# Altium PCB esp32v4.PcbDoc (part 1 of 3)
Units mm, origin at the board's own origin, x right, y up, seen from the top; angles counter-clockwise.
Board outline 100.25 x 100.25 mm, 2 copper layers (Top Layer, Bottom Layer), stack 1.536 mm thick; 107 components, 81 nets, 416 pads, 1990 vias.
Unrouted connection lines stored in the file: 16.
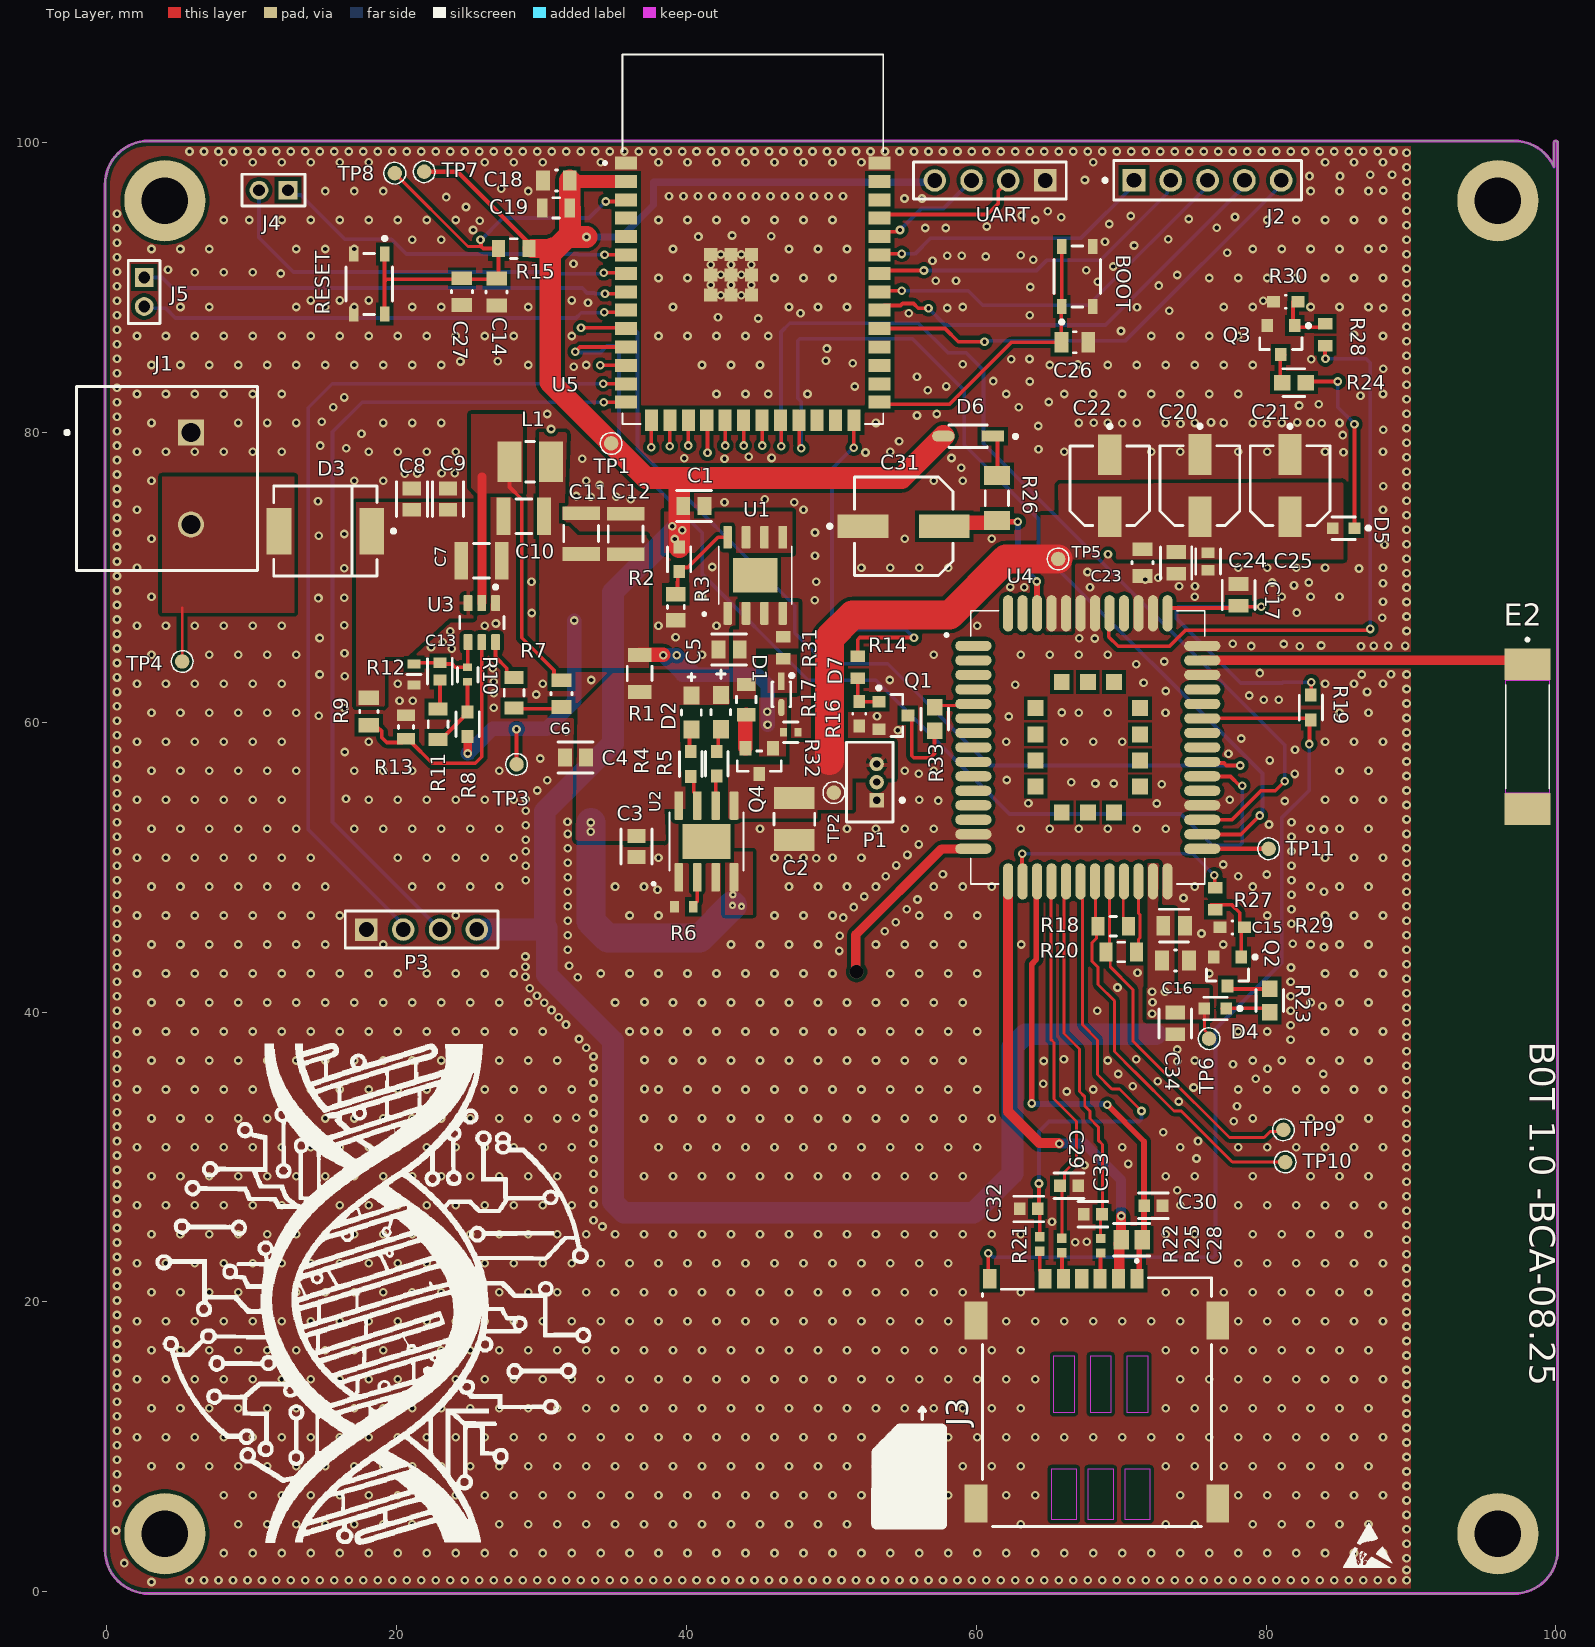
[diagram p0: Top Layer view]
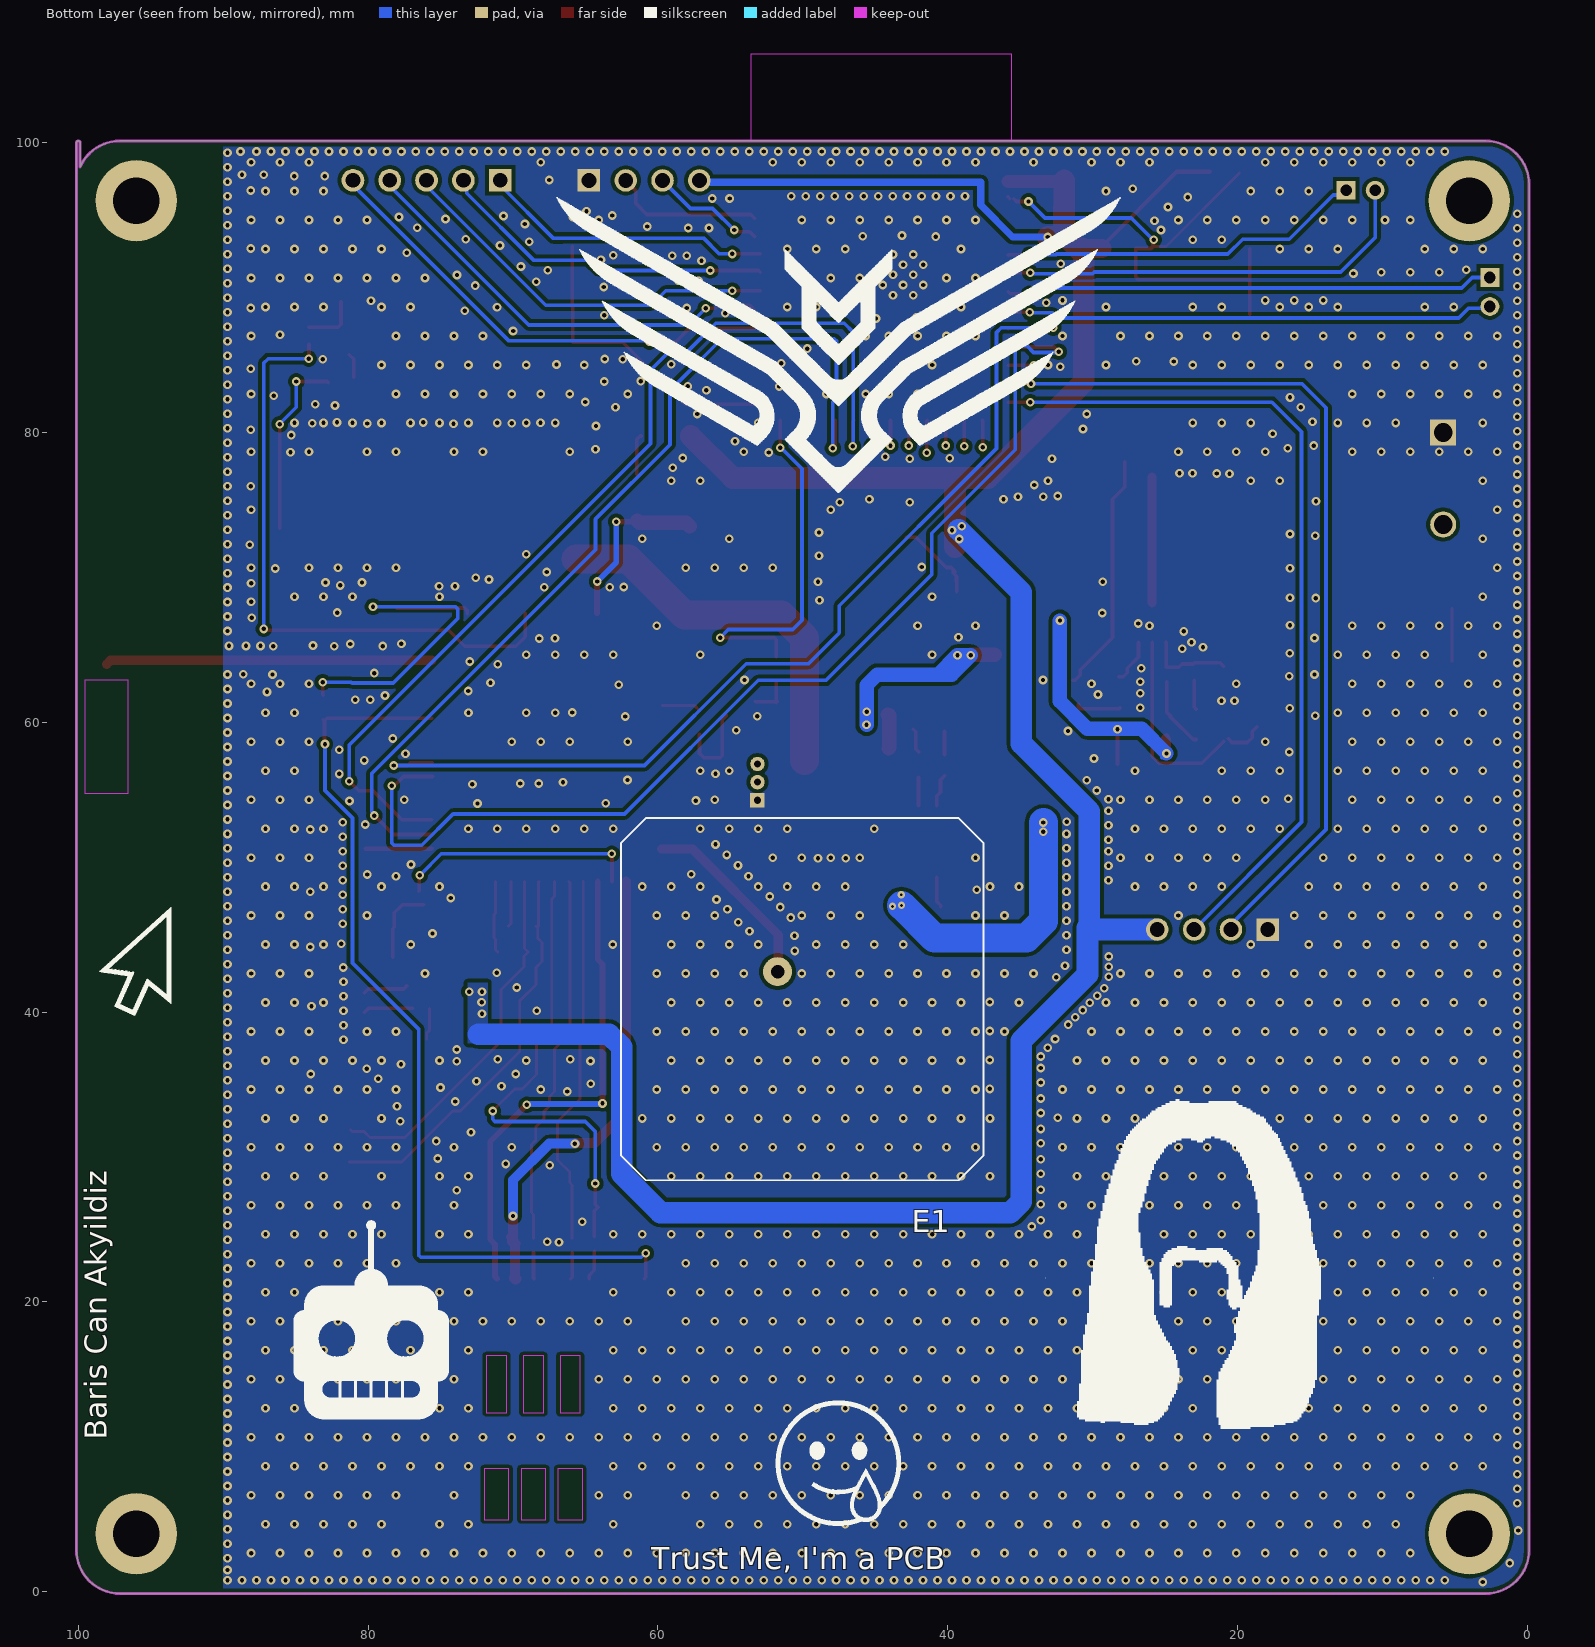
[diagram p1: Bottom Layer view, seen from below]
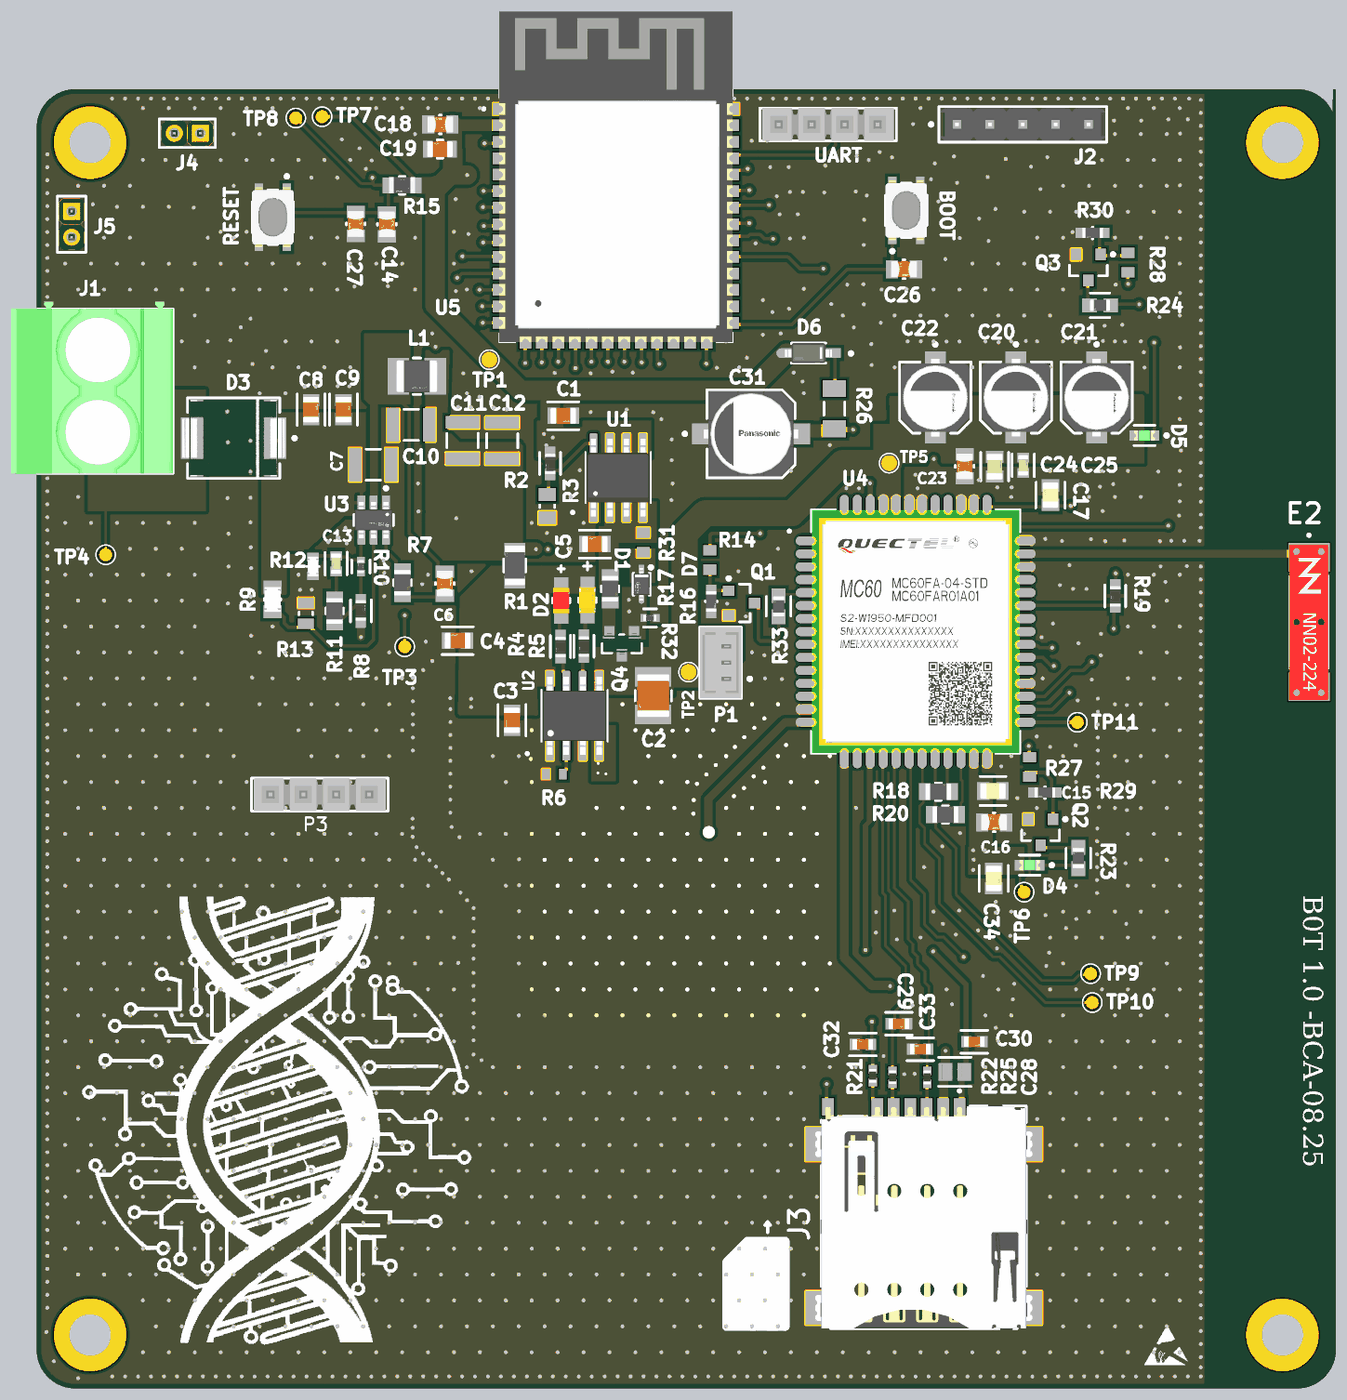
[diagram p3: 3D render of the assembled board from above, using the file's embedded part models]

## Layer stack, top to bottom
Top Solder: solder mask 0.0102, Solder Resist, Dk 3.5
Top Layer: signal copper 0.0356
Dielectric 1: dielectric 1.465, FR-4, Dk 4.8
Bottom Layer: signal copper 0.0356
Bottom Solder: solder mask 0.0102, Solder Resist, Dk 3.5

## Board outline
-0.127,2.875 ccw(c2.875,2.875) 2.875,-0.127 97.125,-0.127 ccw(c97.125,2.875) 100.127,2.875 100.127,100 ccw(c100,100) 99.873,100 99.873,98.335 ccw(c97.125,97.125) 97.125,100.127 2.876,100.127 2.875,100.127 ccw(c2.875,97.125) -0.127,97.127 -0.127,97.125

## Design rules (kind name [scope] priority, off if disabled: settings)
Clearance [InNet('NetE1_1') vs InNet('NetE1_1')] p1: gap=0.152 ignorepadtopadclearanceinfootprint=TRUE
Clearance Clearance_3 [InNet('GNSS_ANT') vs InNet('GNSS_ANT')] p2: gap=0.152 ignorepadtopadclearanceinfootprint=TRUE
Clearance Clearance_2 [All] p3: gap=0.254 ignorepadtopadclearanceinfootprint=TRUE
Clearance Clearance_1 [All] p4: gap=0.1 ignorepadtopadclearanceinfootprint=TRUE
HoleSize [All] p1: absolutevalues=TRUE maxlimit=8 minlimit=0.025 maxpercent=80.000 minpercent=20.000
HoleToHoleClearance [All] p1: gap=0.2 allowstackedmicrovias=TRUE
MinimumSolderMaskSliver [All] p1: minsoldermaskwidth=0.04
PolygonConnect [All] p1: connectstyle=Direct reliefconductorwidth=0.254 reliefentries=4 polygonreliefangle="90 Angle" airgapwidth=0.254
RoutingVias [All] p1: holewidth=0.3 width=0.45 viastyle="Through Hole" minholewidth=0.15 minwidth=0.4 maxholewidth=6.3 maxwidth=6.3
SilkToSilkClearance [All] p1: silktosilkclearance=0.08
SilkToSolderMaskClearance [IsPad] p1: minsilkscreentomaskgap=0.15 clearancetoexposedcopper=TRUE
SolderMaskExpansion [All] p1: expansion=0.102 istentingtop=FALSE
SupplyNets "Schematic Supply Nets_3" [InNet('VBAT')] p1: voltage=0.000
SupplyNets "Schematic Supply Nets_2" [InNet('+12')] p2: voltage=0.000
SupplyNets "Schematic Supply Nets" [InNet('5V')] p3: voltage=0.000
SupplyNets "Schematic Supply Nets_1" [InNet('GND')] p4: voltage=0.000
UnRoutedNet [All] p1: checkbadconnections=TRUE
Width [InNet('NetE1_1')] p1: maxlimit=0.7 minlimit=0.254 preferedwidth=0.254
Width Width_2 [InNet('GNSS_ANT')] p2: maxlimit=0.7 minlimit=0.254 preferedwidth=0.254
Width Width_1 [All] p3: maxlimit=9 minlimit=0.15 preferedwidth=0.254
24 further rules are at their usual default settings.

## Classes and differential pairs
component class pwrmngmnt: C1 C2 C3 C4 C5 C6 C7 C8 C9 C10 C11 C12 C13 D1 D2 D3 D7 J1 L1 P1 Q4 R1 R2 R3 R4 R5 R6 R7 R8 R9 R10 R11 R12 R13 R17 R31 R32 TP1 TP2 TP3 TP4 U1 U2 U3
component class esp32v4: BOOT C14 C15 C16 C17 C18 C19 C20 C21 C22 C23 C24 C25 C26 C27 C28 C29 C30 C31 C32 C33 C34 D4 D5 D6 E1 E2 J2 J3 J4 J5 P3 Q1 Q2 Q3 R14 R15 R16 R18 R19 R20 R21 R22 R23 R24 R25 R26 R27 R28 R29 R30 R33 RESET TP5 TP6 TP7 TP8 TP9 TP10 TP11 U4 U5 UART

## Components (designator, comment, footprint, x,y, rotation, side; value= is the part's Value field where it differs from the comment)
BOOT "PTS810SJM250SMTRLFS" FP-PTS810SJM250SMTRLFS-MFG 66.975,90.775 r90 top
C1 "10uF" FP-GRM21B-0_1-IPC_C 40.51,74.925 r0 top
C2 "10uF" FP-1210-L_3_3_0_4-W_2_5_0-IPC_B 47.45,53.325 r270 top
C3 "10uF" FP-GRM21B-0_1-IPC_C 36.55,51.435 r270 top
C4 "10uF_NC" FP-GRM21B-0_1-IPC_C 32.35,57.575 r180 top value=10uF
C5 "10uF" FP-GRM21B-0_1-IPC_C 42.95,65.025 r180 top
C6 "0.1UF" FP-CC0805-0_85-MFG 31.369,61.976 r90 top value="100 nF"
C7 "10uF" CAPC1210(3225)280_L 25.85,71.15 r0 top
C8 "10uF_NC" FP-GRM21B-0_1-IPC_C 21.05,75.4 r90 top value=10uF
C9 "10uF" FP-GRM21B-0_1-IPC_C 23.55,75.4 r90 top
C10 "22uF_NC" CAPC1210(3225)230_L 28.775,74.225 r180 top value=22uF
C11 "22uF" CAPC1210(3225)230_L 32.735,73.025 r90 top
C12 "22uF" CAPC1210(3225)230_L 35.8,73 r90 top
C13 "82PF" FP-C0603C-CF-MFG 22.985,63.513 r90 top value="82 pF"
C14 "0.1uF" FP-CC0805-0_85-MFG 26.9,89.7 r90 top value="100 nF"
C15 "10uF" FP-C0805C106K4PACTU-MFG 73.66,45.974 r0 top
C16 "10uF" FP-CC0805-0_85-MFG 73.752,43.561 r0 top value="100 nF"
C17 "10uF" FP-C0805C106K4PACTU-MFG 78.1,68.8 r90 top
C18 "0.1uF" FP-CC0805-0_85-MFG 31.025,97.4 r180 top value="100 nF"
C19 "22uF" FP-GRM21B-0_15-MFG 31,95.502 r180 top
C20 "100uF" FP-SC-MFG 75.438,76.336 r270 top
C21 "100uF" FP-SC-MFG 81.661,76.336 r270 top
C22 "100uF" FP-SC-MFG 69.215,76.327 r270 top
C23 "0.1uF" FP-CC0805-0_85-MFG 71.48,71.022 r270 top value="100 nF"
C24 "10pF" FP-C0805C-DN-MFG 73.8,71 r270 top value="10 pF"
C25 "33pF" FP-C0603C-CF-MFG 76,71.1 r270 top value="33 pF"
C26 "0.1UF" FP-CC0805-0_85-MFG 66.8,86.233 r0 top value="100 nF"
C27 "0.1UF" FP-CC0805-0_85-MFG 24.5,89.725 r270 top value="100 nF"
C28 "150nF" FP-CL21-IPC_C 70.725,24.3 r0 top
C29 "33pF" FP-0603-L_1_6_0_15-W_0_81-IPC_C 66.406,28.013 r0 top
C30 "33pF" FP-0603-L_1_6_0_15-W_0_81-IPC_C 72.225,26.625 r0 top
C31 "47uF" FP-OS-CON-SMT-C6-MFG 54.991,73.533 r0 top
C32 "33pF" FP-0603-L_1_6_0_15-W_0_81-IPC_C 63.618,26.416 r180 top
C33 "33pF" FP-0603-L_1_6_0_15-W_0_81-IPC_C 68.05,26.05 r180 top
C34 "10uF_NC" FP-C0805C106K4PACTU-MFG 73.725,39.225 r270 top
D1 "LED GREEN" FP-APT2012MGC-MFG 42.375,60.7 r270 top
D2 "LED RED" FP-AP2012EC-MFG 40.343,60.668 r270 top
D3 "SS34-E3/57T" FP-95402-MFG 15.075,73.2 r180 top
D4 "HSMR-C191" FP-HSMR-C191-MFG 76.5,40.25 r180 top
D5 "HSMR-C191" FP-HSMR-C191-MFG 85.356,73.406 r180 top
D6 "1N5819HW-7-F" FP-SOD123-IPC_A 59.436,79.756 r180 top
D7 "BAT60AE6327HTSA1" FP-PG-SOD323-2-IPC_C 46.55,61.925 r270 top
E1 "YFGC025WWB" XDCR_YFGC025WWB 50.038,40.894 r270 bottom
E2 "GSM_ANT NN02-224" XCVR_NN02-224 98.044,59.008 r270 top
J1 "1714955" PHOE-1714955_V 5.8,76.825 r270 top
J2 "22-28-4050" FP-22-28-4050-MFG 75.964,97.409 r0 top
J3 "SIM7100-6-1-15-00-A_REVC2" GCT_SIM7100-6-1-15-00-A_REVC2 68.326,13.081 r0 top
J4 "M22-2510205" FP-M22-2510205-MFG 11.5,96.725 r180 top
J5 "M22-2510205" FP-M22-2510205-MFG 2.575,89.7 r270 top
L1 "10uH" FP-CB3225-IPC_A 29.21,77.978 r0 top
P1 "530470310" MOLX-530470310_V 53.125,55.875 r270 top
P3 "TSW-104-08-L-S" SMTC-TSW-104-08-X-S 17.91,45.7 r0 top
Q1 "MMBT5088LT1G" ONSC-SOT-23-3-318-08_V 54.275,60.475 r0 top
Q2 "MMBT5088LT1G" ONSC-SOT-23-3-318-08_V 77.343,42.799 r270 top
Q3 "MMBT5088LT1G" ONSC-SOT-23-3-318-08_V 81.025,86.375 r270 top
Q4 "IRLML6402TRPBF" FP-Micro3-MFG 45.025,57.325 r270 top
R1 "0.4Ω" FP-CSR1206-IPC_C 36.767,63.373 r90 top
R2 "10K" FP-RT0603-MFG 39.497,71.247 r270 top value=10KΩ
R3 "45.3K" RESC2013X60X35NL10T20 39.275,67.95 r270 top
R4 "1K" FP-RT0603-MFG 40.3,57.125 r270 top value=1kΩ
R5 "1K" FP-RT0603-MFG 42.1,57.15 r270 top value=1kΩ
R6 "RC0603FR-071K2L" RESC1608X55X25LL10T15 39.825,47.275 r180 top
R7 "0 OHM" FP-RMCF0805-MFG 28.1,62.05 r270 top
R8 "49.9K" FP-RT0603-MFG 24.89,59.865 r90 top value=49.9KΩ
R9 "511kΩ" FP-CRCW0805-e3-IPC_B 18.075,60.75 r270 top value=511kR
R10 "100K" FP-RT0402-MFG 24.89,63.294 r90 top value=100KΩ
R11 "0 OHM" FP-RMCF0805-MFG 22.858,59.865 r270 top
R12 "13.3k" FP-ERJ3EK-MFG 21.2,63.3 r270 top
R13 "105K" RESC2013X60X35LL10T20 20.643,59.677 r270 top
R14 "RC0603JR-074K7L" RESC1608X55X25ML10T15 51.825,63.8 r270 top
R15 "10k" FP-RT0805-MFG 28.075,92.7 r180 top value=10KΩ
R16 "RC0603FR-0747KL" FP-RC0603FR-0747KL-MFG 51.925,60.6 r270 top
R17 "0 OHM" FP-RMCF0805-MFG 44.125,61.575 r270 top
R18 "0 OHM" FP-RMCF0805-MFG 69.45,45.925 r0 top
R19 "10k" FP-RT0603-MFG 83.1,61.025 r270 top value=10KΩ
R20 "0 OHM" FP-RMCF0805-MFG 70,44.15 r0 top
R21 "22Ω" RESC1005X40X25ML05T05 64.389,24.003 r270 top
R22 "22Ω" RESC1005X40X25ML05T05 65.913,23.884 r90 top
R23 "300Ω" FP-CRCW0603-e3-IPC_A 80.25,40.8 r90 top
R24 "300Ω" FP-CRCW0603-e3-IPC_A 81.925,83.45 r180 top
R25 "22Ω" RESC1005X40X25ML05T05 68.58,23.876 r90 top
R26 "470Ω" RESC3216X60X45ML10T20 61.425,75.475 r270 top
R27 "RC0603JR-074K7L" RESC1608X55X25ML10T15 76.5,47.825 r270 top
R28 "RC0603JR-074K7L" RESC1608X55X25ML10T15 84.075,86.75 r90 top
R29 "RC0603FR-0747KL" FP-RC0603FR-0747KL-MFG 77.675,45.85 r180 top
R30 "RC0603FR-0747KL" FP-RC0603FR-0747KL-MFG 81.354,89.027 r180 top
R31 "0 OHM" RESC1608X55X25ML10T15 46.675,65.15 r90 top
R32 "100K" FP-RT0402-MFG 47.2,59.325 r0 top value=100KΩ
R33 "300Ω" FP-CRCW0603-e3-IPC_A 57.125,60.225 r90 top
RESET "PTS810SJM250SMTRLFS" FP-PTS810SJM250SMTRLFS-MFG 18.1,90.25 r270 top
TP1 "Test point" Test_Point 34.8,79.25 r0 top
TP2 "Test point" Test_Point 50.175,55.15 r0 top
TP3 "Test point" Test_Point 28.275,57.1 r0 top
TP4 "Test point" Test_Point 5.2,64.2 r90 top
TP5 "Test point" Test_Point 65.65,71.275 r90 top
TP6 "Test point" Test_Point 76.066,38.166 r90 top
TP7 "Test point" Test_Point 21.9,98 r180 top
TP8 "Test point" Test_Point 19.871,97.9 r90 top
TP9 "Test point" Test_Point 81.2,31.875 r90 top
TP10 "Test point" Test_Point 81.325,29.65 r90 top
TP11 "Test point" Test_Point 80.175,51.275 r90 top
U1 "AP7362" SOIC127P600X163-9N 44.745,70.15 r90 top
U2 "TP4056" SOP127P600X175-9N 41.377,51.778 r90 top
U3 "TPS54302DDCR" FP-DDC0006A-MFG 25.877,66.882 r270 top
U4 "MC60" XCVR_MC60 67.7,58.275 r0 top
U5 "ESP32-S3-WROOM-1-N8R8" XCVR_ESP32S3WROOM1N8R8 44.577,93.345 r0 top
UART "TSW-104-08-L-S" SMTC-TSW-104-08-X-S 64.755,97.4 r180 top

## Footprints (in the part's own frame and the unit in brackets; to place one, negate y for a bottom-side part, rotate by r counter-clockwise, add the part's x,y. Pads: shape width x height; smd on the part's side, far side on the other; paste and mask are expansions set on the pad)
CAPC1210(3225)230_L [mm] "Chip Capacitor, Body 3.2x2.5mm, Height 2.3mm, IPC High Density"
  rect 0.95x2.6 smd: 1(-1.4,0) 2(1.4,0)
  silkscreen extent -0.55,-1.2 0.55,1.2, body extent -1.7,-1.35 1.7,1.35, height 2.3
CAPC1210(3225)280_L [mm] "Chip Capacitor, Body 3.2x2.5mm, Height 2.8mm, IPC High Density"
  rect 0.95x2.6 smd: 1(-1.4,0) 2(1.4,0)
  silkscreen extent -0.55,-1.2 0.55,1.2, body extent -1.7,-1.4 1.7,1.4, height 2.8
FP-22-28-4050-MFG [mm]
  rect 1.57x1.57 hole 1.02 paste-2539.97 mask+0: 1(-5.08,0)
  round 1.57 hole 1.02 paste-2539.97 mask+0: 2(-2.54,0) 3(0,0) 4(2.54,0) 5(5.08,0)
  silkscreen extent -7.2,-1.37 6.48,1.37, body extent -6.58,-1.47 6.58,1.47, height 0.25
FP-0603-L_1_6_0_15-W_0_81-IPC_C [mm]
  rect 0.807x0.868 smd paste+0 mask+0: 1(-0.626,0) 2(0.626,0)
  silkscreen extent -1.03,-0.88 1.03,0.88, body extent -1.13,-0.58 1.13,0.58, height 0.25
FP-1210-L_3_3_0_4-W_2_5_0-IPC_B [mm]
  rect 1.503x2.804 smd paste+0 mask+0: 1(-1.45,0) 2(1.45,0)
  silkscreen extent -0.4,-1.4 0.4,1.4, body extent -2.45,-1.65 2.45,1.65, height 0.25
FP-95402-MFG [mm]
  rect 1.72x3.2 smd paste+0 mask+0: 1(-3.205,0) 2(3.205,0)
  silkscreen extent -4.83,-3.11 3.55,3.11, body extent -4.17,-3.21 4.17,3.21, height 0.25
FP-AP2012EC-MFG [mm]
  rect 1.25x1.1 smd paste+0 mask+0: 1(-1.175,0) 2(1.175,0)
  silkscreen extent -2.7,-0.67 0.18,0.67, body extent -1.9,-0.77 1.9,0.77, height 0.25
FP-APT2012MGC-MFG [mm]
  rect 1.25x1.1 smd paste+0 mask+0: 1(-1.175,0) 2(1.175,0)
  silkscreen extent -2.93,-0.67 0.18,0.67, body extent -1.9,-0.77 1.9,0.77, height 0.25
FP-C0603C-CF-MFG [mm]
  rect 0.75x0.9 smd paste+0 mask+0: 1(-0.6,0) 2(0.6,0)
  silkscreen extent -0.87,-0.85 0.88,0.85, body extent -1.2,-0.6 1.2,0.6, height 0.25
FP-C0805C106K4PACTU-MFG [mm]
  rect 0.95x1.35 smd paste+0 mask+0: 1(-0.75,0) 2(0.75,0)
  silkscreen extent -1,-1.12 1,1.12, body extent -1.4,-0.85 1.4,0.85, height 0.25
FP-C0805C-DN-MFG [mm]
  rect 0.95x1.35 smd paste+0 mask+0: 1(-0.75,0) 2(0.75,0)
  silkscreen extent -1.1,-1.07 1.1,1.07, body extent -1.4,-0.85 1.4,0.85, height 0.25
FP-CB3225-IPC_A [mm]
  rect 1.654x2.806 smd paste+0 mask+0: 1(-1.426,0) 2(1.426,0)
  silkscreen extent -0.3,-1.4 0.3,1.4, body extent -2.75,-1.9 2.75,1.9, height 0.25
FP-CC0805-0_85-MFG [mm]
  rect 0.95x1.4 smd paste+0 mask+0: 1(-0.925,0) 2(0.925,0)
  silkscreen extent -0.08,-0.72 0.08,0.72, body extent -1.6,-1.05 1.6,1.05, height 0.25
FP-CL21-IPC_C [mm]
  rect 1.055x1.356 smd paste+0 mask+0: 1(-0.726,0) 2(0.726,0)
  silkscreen extent -1.25,-1.12 1.25,1.12, body extent -1.35,-0.82 1.35,0.82, height 0.25
FP-CRCW0603-e3-IPC_A [mm]
  rect 1.135x1.062 smd paste+0 mask+0: 1(-0.815,0) 2(0.815,0)
  silkscreen extent -0.75,-0.95 0.75,0.95, body extent -1.88,-1.03 1.88,1.03, height 0.25
FP-CRCW0805-e3-IPC_B [mm]
  rect 1.007x1.408 smd paste+0 mask+0: 1(-0.951,0) 2(0.951,0)
  silkscreen extent -0.07,-0.63 0.07,0.63, body extent -1.7,-0.95 1.7,0.95, height 0.25
FP-CSR1206-IPC_C [mm]
  rect 0.956x1.608 smd paste+0 mask+0: 1(-1.276,0) 2(1.276,0)
  silkscreen extent -0.5,-0.85 0.5,0.85, body extent -1.85,-0.95 1.85,0.95, height 0.25
FP-DDC0006A-MFG [mm]
  rrect17% 1.1x0.6 smd paste+0 mask+0: 1(-1.35,0.95) 2(-1.35,0) 3(-1.35,-0.95) 4(1.35,-0.95) 5(1.35,0) 6(1.35,0.95)
  silkscreen extent -2.57,-1.53 0.43,1.53, body extent -2,-1.63 2,1.63, height 0.25
FP-ERJ3EK-MFG [mm]
  rect 0.65x0.9 smd paste+0 mask+0: 1(-0.725,0) 2(0.725,0)
  silkscreen extent 0,-0.48 0,0.48, body extent -1.15,-0.58 1.15,0.58, height 0.25
FP-GRM21B-0_1-IPC_C [mm]
  rect 0.958x1.262 smd paste+0 mask+0: 1(-0.727,0) 2(0.727,0)
  silkscreen extent -1.21,-1.07 1.21,1.07, body extent -1.31,-0.77 1.31,0.77, height 0.25
FP-GRM21B-0_15-MFG [mm]
  rect 0.7x1.3 smd paste+0 mask+0: 1(-0.95,0) 2(0.95,0)
  silkscreen extent -0.23,-0.7 0.23,0.7, body extent -1.4,-0.8 1.4,0.8, height 0.25
FP-HSMR-C191-MFG [mm]
  rect 0.8x0.8 smd paste+0 mask+0: 1(-0.75,0) 2(0.75,0)
  silkscreen extent -1.83,-0.77 0.8,0.77, body extent -1.25,-0.55 1.25,0.55, height 0.25
FP-M22-2510205-MFG [mm]
  rect 1.3x1.3 hole 0.8 paste-2539.97 mask+0: 1(-1,0)
  round 1.3 hole 0.8 paste-2539.97 mask+0: 2(1,0)
  silkscreen extent -2.17,-1.1 2.17,1.1, body extent -2.27,-1.2 2.27,1.2, height 0.25
FP-Micro3-MFG [mm]
  rect 0.972x0.802 smd paste+0 mask+0: 1(-0.885,0.95) 2(-0.885,-0.95) 3(0.885,0)
  silkscreen extent -0.7,-1.52 0.7,1.52, body extent -1.47,-1.87 1.47,1.87, height 0.25
FP-OS-CON-SMT-C6-MFG [mm]
  rect 3.5x1.6 smd paste+0 mask+0: 1(-2.8,0) 2(2.8,0)
  silkscreen extent -5.22,-3.4 3.4,3.4, body extent -4.8,-3.65 4.8,3.65, height 0.25
FP-PG-SOD323-2-IPC_C [mm]
  rect 1.205x0.436 smd paste+0 mask+0: 1(-0.9,0)
  rrect100% 1.205x0.436 smd paste+0 mask+0: 2(0.9,0)
  silkscreen extent -1.43,-0.65 0.85,0.84, body extent -1.6,-0.72 1.6,0.72, height 0.25
FP-PTS810SJM250SMTRLFS-MFG [mm]
  rect 1.05x0.65 smd paste+0 mask+0: 1(-2.075,1.075) 2(2.075,1.075) 3(-2.075,-1.075) 4(2.075,-1.075)
  silkscreen extent -3.27,-1.6 2.1,1.6, body extent -2.7,-1.7 2.7,1.7, height 0.25
FP-RC0603FR-0747KL-MFG [mm]
  rect 0.9x0.8 smd paste+0 mask+0: 1(-0.85,0) 2(0.85,0)
  silkscreen extent -0.03,-0.45 0.03,0.45, body extent -1.4,-0.55 1.4,0.55, height 0.25
FP-RMCF0805-MFG [mm]
  rect 0.9x1.3 smd paste+0 mask+0: 1(-1.05,0) 2(1.05,0)
  silkscreen extent -0.23,-0.67 0.23,0.67, body extent -1.6,-0.77 1.6,0.77, height 0.25
FP-RT0402-MFG [mm]
  rect 0.5x0.6 smd paste+0 mask+0: 1(-0.5,0) 2(0.5,0)
  silkscreen extent -0.5,-0.71 0.5,0.7, body extent -0.85,-0.4 0.85,0.4, height 0.25
FP-RT0603-MFG [mm]
  rect 0.9x0.8 smd paste+0 mask+0: 1(-0.85,0) 2(0.85,0)
  silkscreen extent -0.85,-0.81 0.86,0.8, body extent -1.4,-0.55 1.4,0.55, height 0.25
FP-RT0805-MFG [mm]
  rect 0.9x1.2 smd paste+0 mask+0: 1(-1.05,0) 2(1.05,0)
  silkscreen extent -0.23,-0.67 0.23,0.67, body extent -1.6,-0.77 1.6,0.77, height 0.25
FP-SC-MFG [mm]
  rect 2.8x1.6 smd paste+0 mask+0: 1(-2.15,0) 2(2.15,0)
  silkscreen extent -4.22,-2.75 2.75,2.75, body extent -3.8,-3 3.8,3, height 0.25
FP-SOD123-IPC_A [mm]
  rect 1.557x0.742 smd paste+0 mask+0: 1(-1.7,0)
  rrect100% 1.557x0.742 smd paste+0 mask+0: 2(1.7,0)
  silkscreen extent -3.39,-0.77 1.33,0.77, body extent -2.98,-1.28 2.98,1.28, height 0.25
GCT_SIM7100-6-1-15-00-A_REVC2 [mm]
  rect 0.9x1.35 smd: C1(2.765,8.52) C2(0.225,8.52) C3(-2.315,8.52) C5(1.495,8.52) C6(-1.045,8.52) C7(-3.585,8.52) CD(-7.395,8.52)
  rect 1.56x2.61 smd: G1(-8.34,5.645) G2(8.34,5.645) G3(-8.34,-6.985) G4(8.34,-6.985)
  Keep-Out Layer region: -1.575,-0.725 -2.975,-0.725 -2.975,3.215 -1.575,3.215
  Keep-Out Layer region: -1.425,-8.105 -3.125,-8.105 -3.125,-4.585 -1.425,-4.585
  Keep-Out Layer region: 0.965,-0.725 -0.435,-0.725 -0.435,3.215 0.965,3.215
  Keep-Out Layer region: 1.115,-8.105 -0.585,-8.105 -0.585,-4.585 1.115,-4.585
  Keep-Out Layer region: 3.505,-0.725 2.105,-0.725 2.105,3.215 3.505,3.215
  Keep-Out Layer region: 3.655,-8.105 1.955,-8.105 1.955,-4.585 3.655,-4.585
  silkscreen extent -7.91,-8.58 7.91,9.85, body extent -8.37,-8.66 8.37,8.66, height 1.5
MOLX-530470310_V [mm] "THD, 3-Leads, Body 5.5x3.2mm, Pitch 1.25mm"
  rect 1x1 hole 0.5: 1(1.25,0)
  round 1 hole 0.5: 2(0,0) 3(-1.25,0)
  silkscreen extent -2.75,-2.07 2.75,1.9, body extent -2.75,-2.07 2.75,1.13, height 4.18
ONSC-SOT-23-3-318-08_V [mm] "SOT23, 3-Leads, Body 2.92x1.3mm, Pitch 0.95mm"
  rect 0.9x0.8 smd: 1(-1,0.95) 2(-1,-0.95) 3(1,0)
  silkscreen extent -1.12,-1.46 0.65,2.02, body extent -0.65,-1.46 0.65,1.46, height 1.11
PHOE-1714955_V [mm] "Terminal Block, 2-Leads, Body 12.7x12.5mm, Pitch 6.35mm"
  rect 1.8x1.8 hole 1.3: 1(-3.175,0)
  round 1.8 hole 1.3: 2(3.175,0)
  silkscreen extent -6.35,-8.67 6.35,4.6, body extent -6.92,-7.9 6.35,4.6, height 21.51
RESC1005X40X25ML05T05 [mm] "Chip Resistor, 2-Leads, Body 1.05x0.55mm, IPC Low Density"
  rect 0.65x0.65 smd: 1(-0.5,0) 2(0.5,0)
  body extent -0.53,-0.28 0.53,0.28, height 0.4
RESC1608X55X25LL10T15 [mm] "Chip Resistor, 2-Leads, Body 1.70x0.90mm, IPC High Density"
  rect 0.6x0.8 smd: 1(-0.65,0) 2(0.65,0)
  body extent -0.85,-0.45 0.85,0.45, height 0.55
RESC1608X55X25ML10T15 [mm] "Chip Resistor, 2-Leads, Body 1.60x0.80mm, IPC Low Density"
  rect 0.8x1 smd: 1(-0.75,0) 2(0.75,0)
  body extent -0.85,-0.45 0.85,0.45, height 0.55
RESC2013X60X35LL10T20 [mm] "Chip Resistor, 2-Leads, Body 2.00x1.25mm, IPC High Density"
  rect 0.8x1.25 smd: 1(-0.8,0) 2(0.8,0)
  silkscreen extent -0.1,-0.53 0.1,0.53, body extent -1.05,-0.67 1.05,0.67, height 0.6
RESC2013X60X35NL10T20 [mm] "Chip Resistor, 2-Leads, Body 2.00x1.25mm, IPC Medium Density"
  rect 1x1.35 smd: 1(-0.9,0) 2(0.9,0)
  silkscreen extent -0.1,-0.58 0.1,0.58, body extent -1.05,-0.67 1.05,0.67, height 0.6
RESC3216X60X45ML10T20 [mm] "Chip Resistor, 2-Leads, Body 3.20x1.60mm, IPC Low Density"
  rect 1.3x1.8 smd: 1(-1.55,0) 2(1.55,0)
  silkscreen extent -0.5,-0.8 0.5,0.8, body extent -1.65,-0.85 1.65,0.85, height 0.6
SMTC-TSW-104-08-X-S [mm] ".025 SQ Post Terminal Strip Assembly, 1x4 Pins, Vertical, 2.54mm Pitch, Male"
  rect 1.55x1.55 hole 1.02: 1(0,0)
  round 1.55 hole 1.02: 2(2.54,0) 3(5.08,0) 4(7.62,0)
  silkscreen extent -1.46,-1.27 9.08,1.27, body extent -1.27,-1.27 8.89,1.27, height 8.38
SOIC127P600X163-9N [mm]
  rrect25% 1.58x0.59 smd: 1(-2.625,1.905) 2(-2.625,0.635) 3(-2.625,-0.635) 4(-2.625,-1.905) 5(2.625,-1.905) 6(2.625,-0.635) 7(2.625,0.635) 8(2.625,1.905)
  rect 2.41x3.05 smd paste-3: 9(0,0)
  silkscreen extent -2.78,-2.52 1.97,3.61, body extent -3,-2.45 3,2.45, height 1.63
SOP127P600X175-9N [mm]
  rrect25% 1.97x0.6 smd: 1(-2.475,1.905) 2(-2.475,0.635) 3(-2.475,-0.635) 4(-2.475,-1.905) 5(2.475,-1.905) 6(2.475,-0.635) 7(2.475,0.635) 8(2.475,1.905)
  rect 2.413x3.302 smd paste-3: 9(0,0)
  silkscreen extent -3.02,-2.55 2,3.75, body extent -3,-2.45 3,2.45, height 1.75
Test_Point [mm]
  round 1 smd paste-0.6: TP?(0,0)
  silkscreen extent -0.75,-0.75 0.75,0.75, body extent -0.6,-0.6 0.6,0.6, height 0.03
XCVR_ESP32S3WROOM1N8R8 [mm]
  rect 1.5x0.9 smd: 1(-8.75,5.26) 2(-8.75,3.99) 3(-8.75,2.72) 4(-8.75,1.45) 5(-8.75,0.18) 6(-8.75,-1.09) 7(-8.75,-2.36) 8(-8.75,-3.63) 9(-8.75,-4.9) 10(-8.75,-6.17) 11(-8.75,-7.44) 12(-8.75,-8.71) 13(-8.75,-9.98) 14(-8.75,-11.25) 27(8.75,-11.25) 28(8.75,-9.98) 29(8.75,-8.71) 30(8.75,-7.44) 31(8.75,-6.17) 32(8.75,-4.9) 33(8.75,-3.63) 34(8.75,-2.36) 35(8.75,-1.09) 36(8.75,0.18) 37(8.75,1.45) 38(8.75,2.72) 39(8.75,3.99) 40(8.75,5.26)
  rect 0.9x1.5 smd: 15(-6.985,-12.5) 16(-5.715,-12.5) 17(-4.445,-12.5) 18(-3.175,-12.5) 19(-1.905,-12.5) 20(-0.635,-12.5) 21(0.635,-12.5) 22(1.905,-12.5) 23(3.175,-12.5) 24(4.445,-12.5) 25(5.715,-12.5) 26(6.985,-12.5)
  rect 0.9x0.9 smd: 41(-2.9,-3.86) 41(-2.9,-2.46) 41(-2.9,-1.06) 41(-1.5,-3.86) 41(-1.5,-2.46) 41(-1.5,-1.06) 41(-0.1,-3.86) 41(-0.1,-2.46) 41(-0.1,-1.06)
  Keep-Out Layer region: 9,6.75 -9,6.75 -9,12.75 9,12.75
  Keep-Out Layer region: 9,6.75 -9,6.75 -9,12.75 9,12.75
  silkscreen extent -10.3,-12.75 9,12.75, body extent -9,-12.75 9,12.75, height 3.25
XCVR_MC60 [mm]
  oval 2.5x0.7 smd paste-2: 1(-7.9,7) 2(-7.9,6) 3(-7.9,5) 4(-7.9,4) 5(-7.9,3) 6(-7.9,2) 7(-7.9,1) 8(-7.9,0) 9(-7.9,-1) 10(-7.9,-2) 11(-7.9,-3) 12(-7.9,-4) 13(-7.9,-5) 14(-7.9,-6) 15(-7.9,-7) 28(7.9,-7) 29(7.9,-6) 30(7.9,-5) 31(7.9,-4) 32(7.9,-3) 33(7.9,-2) 34(7.9,-1) 35(7.9,0) 36(7.9,1) 37(7.9,2) 38(7.9,3) 39(7.9,4) 40(7.9,5) 41(7.9,6) 42(7.9,7)
  oval 0.7x2.5 smd paste-2: 16(-5.5,-9.25) 17(-4.5,-9.25) 18(-3.5,-9.25) 19(-2.5,-9.25) 20(-1.5,-9.25) 21(-0.5,-9.25) 22(0.5,-9.25) 23(1.5,-9.25) 24(2.5,-9.25) 25(3.5,-9.25) 26(4.5,-9.25) 27(5.5,-9.25) 43(5.5,9.25) 44(4.5,9.25) 45(3.5,9.25) 46(2.5,9.25) 47(1.5,9.25) 48(0.5,9.25) 49(-0.5,9.25) 50(-1.5,9.25) 51(-2.5,9.25) 52(-3.5,9.25) 53(-4.5,9.25) 54(-5.5,9.25)
  rect 1.1x1.1 smd paste-0.09: 55(-3.6,2.7) 56(-3.6,0.9) 57(-3.6,-0.9) 58(-3.6,-2.7) 59(-1.8,-4.5) 60(0,-4.5) 61(1.8,-4.5) 62(3.6,-2.7) 63(3.6,-0.9) 64(3.6,0.9) 65(3.6,2.7) 66(1.8,4.5) 67(0,4.5) 68(-1.8,4.5)
  oval 2.5x0.7 on Top Paste paste-2: ""(-8,-6.985) ""(-8,-6) ""(-8,-5) ""(-8,-4) ""(-8,-3) ""(-8,-2) ""(-8,-1) ""(-8,0) ""(-8,1) ""(-8,2) ""(-8,3) ""(-8,4) ""(-8,5) ""(-8,6) ""(-8,7) ""(8,-7) ""(8,-6) ""(8,-5) ""(8,-4) ""(8,-3) ""(8,-2) ""(8,-1) ""(8,0) ""(8,1) ""(8,2) ""(8,3) ""(8,4) ""(8,5) ""(8,6) ""(8,7)
  oval 0.7x2.5 on Top Paste paste-2: ""(-5.5,-9.3) ""(-5.5,9.3) ""(-4.5,-9.3) ""(-4.5,9.3) ""(-3.5,-9.3) ""(-3.5,9.3) ""(-2.5,-9.3) ""(-2.5,9.3) ""(-1.5,-9.3) ""(-1.5,9.3) ""(-0.5,-9.3) ""(-0.5,9.3) ""(0.5,-9.3) ""(0.5,9.3) ""(1.5,-9.3) ""(1.5,9.3) ""(2.5,-9.3) ""(2.5,9.3) ""(3.5,-9.3) ""(3.5,9.3) ""(4.5,-9.3) ""(4.5,9.3) ""(5.5,-9.3) ""(5.5,9.3)
  silkscreen extent -9.85,-9.43 8.08,9.43, body extent -8,-9.35 8,9.35, height 2.15
XCVR_NN02-224 [mm]
  rect 2.2x3.2 smd: 1(-5,0) 2(5,0)
  Keep-Out Layer region: 3.9,-1.5 -3.9,-1.5 -3.9,1.5 3.9,1.5
  silkscreen extent -6.8,-1.5 3.59,1.5, body extent -6,-1.5 6,1.5, height 2.41
XDCR_YFGC025WWB [mm]
  round 2 smd paste-2: 1(-1.9,-1.7)
  silkscreen extent -12.5,-12.5 12.5,12.5, body extent -12.5,-12.5 12.5,12.5, height 2.7

## Part data
BOOT RESET: library part CMP-10040-000001-2, "SWITCH TACTILE SPST-NO 0.05A 16V", Case/Package=SMD/SMT, Color=Black, Current Rating=50mA, Max Operating Temperature=85°C, Min Operating Temperature=-40°C, Operating Force=160gf, Package Quantity=2900, Voltage Rating (DC)=16V, Actuator Type=Standard, Contact Plating=Silver, Depth=4.6mm, Lead Free="Lead Free", Length=3.2mm, Max Current Rating=50mA, Mechanical Life=150000Cycles, Mount="Surface Mount", Orientation=Straight, Packaging="Tape and Reel", RoHS Compliant=Yes, Switch Function=Off-Mom, Switch Travel=0.15mm, Termination=J-Bend, Throw Configuration=SPST, Illumination Type=Non-Illuminated
C1 C3 C5 C9: library part CMP-2007-03453-2, "Chip Multilayer Ceramic Capacitors for General Purpose, 0805, 10uF, X5R, 15%, 10%, 16V", Case Code (Metric)=2012, Case Code (Imperial)=0805, Dielectric=X5R, Max Operating Temperature=85°C, Min Operating Temperature=-55°C, Package Quantity=1, Tolerance=10%, Voltage=16V, Capacitance=10uF, Case/Package=0805, Depth=1.25mm, Height=1.25mm, Lead Free="Lead Free", Length=2mm, Material=Ceramic, Mount="Surface Mount", Packaging="Tape and Reel", Radiation Hardening=No, REACH SVHC="No SVHC", Termination=SMD/SMT, Thickness=0.053inch, Voltage Rating=16V, Voltage Rating (DC)=16V, Width=1.25mm
C2: library part CMP-2000-05480-2, "General Purpose Ceramic Capacitor, 1210, 10uF, 10%, X7R, 15%, 50V", Case Code (Metric)=3225, Case Code (Imperial)=1210, Dielectric=X7R, Max Operating Temperature=125°C, Min Operating Temperature=-55°C, Package Quantity=1000, Tolerance=10%, Voltage=50V, Capacitance=10uF, Case/Package=1210, Contact Plating=Tin, Depth=2.5mm, Lead Free="Lead Free", Length=3.2mm, Mount="Surface Mount", Packaging="Tape and Reel", REACH SVHC="No SVHC", RoHS Compliant=Yes, Series=-, Termination=SMD/SMT, Thickness=0.11inch, Voltage Rating=50V, Voltage Rating (DC)=50V, Width=0.098inch
C4 C8: library part CMP-2007-03453-2, "Chip Multilayer Ceramic Capacitors for General Purpose, 0805, 10uF, X5R, 15%, 10%, 16V", Capacitance=10uF, Case Code (Metric)=2012, Case Code (Imperial)=0805, Dielectric=X5R, Max Operating Temperature=85°C, Min Operating Temperature=-55°C, Package Quantity=1, Tolerance=10%, Voltage=16V, Case/Package=0805, Depth=1.25mm, Height=1.25mm, Lead Free="Lead Free", Length=2mm, Material=Ceramic, Mount="Surface Mount", Packaging="Tape and Reel", Radiation Hardening=No, REACH SVHC="No SVHC", Termination=SMD/SMT, Thickness=0.053inch, Voltage Rating=16V, Voltage Rating (DC)=16V, Width=1.25mm
C6 C14 C26 C27: library part CMP-2100-03606-3, "CAP CER 0.1UF 50V X7R 0805", Capacitance="100 nF", Manufacturer=Yageo, Manufacturer Part Number=CC0805KRX7R9BB104, Package=CC0805-0.85, Temperature="-30°C to +85°C", Temperature Characteristic=X7R, Temperature Range High=+85°C, Temperature Range Low=-30°C, Tolerance=0.1, Voltage Rating="50 V", Automotive=No, Category=Cap, ComponentLink2Description=Datasheet, ComponentLink2URL=http://www.yageo.com/documents/recent/UPY-GPHC_Y5V_6.3V-to-50V_8.pdf, Device Class L1="Passive Components", Device Class L2=Capacitors, Device Class L3="Ceramic Capacitors", Digikey Description="CAP CER 0.1UF 50V X7R 0805", Footprint Url=http://www.yageo.com/exep/pages/download/literatures/UPY-C_GEN_24.pdf, Height=0.95mm, Lead Free=Yes, Material=Ceramic, Mouser Description="Multilayer Ceramic Capacitors MLCC - SMD/SMT 100nF 50V X7R 10%", Octopart=https://octopart.com/cc0805krx7r9bb104-yageo-192993, RoHS=TRUE, Ipc Land Pattern Name=CAPC200125X85
C7: library part CMP-1038-02227-2, "CAP 10uF 25V ±10% 1210 (3225 Metric) Thickness 2.8mm SMD", Case-EIA=1210, Case-Metric=3225, Rated Voltage="25 V", Tolerance=Â±10%, Max Thickness="2.8 mm", Technology=SMT
C10 C11 C12: library part CMP-1038-02281-3, "CAP 22uF 16V -20% to +80% 1210 (3225 Metric) Thickness 2.2mm SMD", Case-EIA=1210, Case-Metric=3225, Rated Voltage="16 V", Tolerance="-20% to +80%", Max Thickness="2.2 mm", Technology=SMT
C13: library part CMP-2006-03274-2, "CAP CER 82PF 50V C0G/NP0 0603", Capacitance="82 pF", Manufacturer=KEMET, Manufacturer Part Number=C0603C820J5GACTU, Package=C0603C-CF, Temperature="-55°C to +125°C", Temperature Characteristic=C0G, Temperature Coefficient=30ppm/°C, Temperature Range High=+125°C, Temperature Range Low=-55°C, Tolerance=0.05, Voltage Rating="50 V", Automotive=Yes, Automotive Grade="Grade 1", Category=Cap, ComponentLink2Description=Datasheet, ComponentLink2URL=https://api.kemet.com/component-edge/download/datasheet/C0603C100J5GACAUTO.pdf, Device Class L1="Passive Components", Device Class L2=Capacitors, Device Class L3="Ceramic Capacitors", Digikey Description="CAP CER 82PF 50V C0G/NP0 0603", Height=0.87mm, Lead Free=Yes, Material=Ceramic, Mouser Description="Multilayer Ceramic Capacitors MLCC - SMD/SMT 50volts 82pF C0G 5%", Octopart=https://octopart.com/c0603c820j5gactu-kemet-96229, RoHS=TRUE
C15 C17: library part CMP-03020-034671-1, "CAP CER 10UF 16V X5R 0805", Case Code (Metric)=2012, Case Code (Imperial)=0805, Dielectric=X5R, Dielectric Material=Ceramic, Max Operating Temperature=85°C, Min Operating Temperature=-55°C, Package Quantity=1, Tolerance=10%, Voltage=16V, Capacitance=10uF, Case/Package=0805, Construction=Flat, Contact Plating=Tin, Depth=1.25mm, Dissipation Factor=5%, Height=1.25mm, Lead Free="Lead Free", Length=2mm, Mount="Surface Mount", Number of Pins=2, Packaging="Tape and Reel", Radiation Hardening=No, REACH SVHC="No SVHC", Series=C, Termination=SMD/SMT, Thickness=0.055inch, Voltage Rating=16V, Voltage Rating (DC)=16V, Width=0.049inch
C16 C18 C23: library part CMP-1036-04410-2, "CAP CER 0.1UF 25V X7R 0805", Capacitance="100 nF", Manufacturer=Yageo, Manufacturer Part Number=CC0805KRX7R8BB104, Package=CC0805-0.85, Temperature="-30°C to +85°C", Temperature Characteristic=X7R, Temperature Range High=+85°C, Temperature Range Low=-30°C, Tolerance=0.1, Voltage Rating="25 V", Automotive=No, Category=Cap, ComponentLink2Description=Datasheet, ComponentLink2URL=http://www.yageo.com/documents/recent/UPY-GPHC_Y5V_6.3V-to-50V_8.pdf, Device Class L1="Passive Components", Device Class L2=Capacitors, Device Class L3="Ceramic Capacitors", Digikey Description="CAP CER 0.1UF 25V X7R 0805", Footprint Url=http://www.yageo.com/exep/pages/download/literatures/UPY-C_GEN_24.pdf, Height=0.95mm, Lead Free=Yes, Material=Ceramic, Mouser Description="Multilayer Ceramic Capacitors MLCC - SMD/SMT 100nF 25V X7R 10%", Octopart=https://octopart.com/cc0805krx7r8bb104-yageo-39467766, RoHS=TRUE, Ipc Land Pattern Name=CAPC200125X85
C19: library part CMP-2007-03385-2, "Chip Multilayer Ceramic Capacitors for General Purpose, 0805, 22uF, X5R, 15%, 20%, 6.3V", Case Code (Metric)=2012, Case Code (Imperial)=0805, Dielectric=X5R, Max Operating Temperature=85°C, Min Operating Temperature=-55°C, Package Quantity=1, Tolerance=20%, Voltage=6.3V, Capacitance=22uF, Case/Package=0805, Depth=1.25mm, Height=1.25mm, Lead Free="Lead Free", Length=2mm, Material=Ceramic, Mount="Surface Mount", Packaging="Tape and Reel", Radiation Hardening=No, REACH SVHC="No SVHC", Termination=SMD/SMT, Thickness=0.053inch, Voltage Rating=6.3V, Voltage Rating (DC)=6.3V, Width=0.049inch
C20 C21 C22: library part CMP-05427-000047-1, "CAP ALUM 100UF 20% 10V SMD", Case/Package=Radial, Max Operating Temperature=85°C, Min Operating Temperature=-40°C, Package Quantity=1, Ripple Current=50mA, Tolerance=20%, Voltage Rating=10V, Capacitance=100uF, Construction=Cylindrical, Contact Plating=Tin, Diameter=5mm, Height=5.4mm, Height - Seated (Max)=0.213inch, Lead Free="Lead Free", Length=5.5mm, Life (Hours)=1000Hour, Mount="Surface Mount", Packaging="Tape and Reel", Radiation Hardening=No, Ripple Current (AC)=50mA, RoHS Compliant=Yes, Series=S, Termination=SMD/SMT, Voltage Rating (DC)=10V
C24: library part CMP-1036-00875-3, "Cap Ceramic 10pF 100V C0G 5% SMD 0805 125C Plastic T/R", Capacitance="10 pF", Manufacturer=KEMET, Manufacturer Part Number=C0805C100J1GACTU, Package=C0805C-DN, Temperature="-55°C to +125°C", Temperature Characteristic=C0G, Temperature Coefficient=30ppm/°C, Temperature Range High=+125°C, Temperature Range Low=-55°C, Tolerance=0.05, Voltage Rating="100 V", Automotive=No, Category=Cap, ComponentLink2Description=Datasheet, ComponentLink2URL=https://content.kemet.com/datasheets/KEM_C1003_C0G_SMD.pdf, Device Class L1="Passive Components", Device Class L2=Capacitors, Device Class L3="Ceramic Capacitors", Digikey Description="Cap Ceramic 10pF 100V C0G 5% SMD 0805 125C Plastic T/R", Height=0.88mm, Lead Free=Yes, Material=Ceramic, Mouser Description="Multilayer Ceramic Capacitors MLCC - SMD/SMT 100volts 10pF C0G 5%", Octopart=https://octopart.com/c0805c100j1gactu-kemet-127179, RoHS=TRUE, Ipc Land Pattern Name=CAPC200125X78
C25: library part CMP-2006-03168-3, "Capacitor; Ceramic; Cap; 33.0pF; Tol 5%; SMT; Vol-Rtg 50V; C0G; Tape and Reel", Capacitance="33 pF", Manufacturer=KEMET, Manufacturer Part Number=C0603C330J5GACTU, Package=C0603C-CF, Temperature="-55°C to +125°C", Temperature Characteristic=C0G, Temperature Coefficient=30ppm/°C, Temperature Range High=+125°C, Temperature Range Low=-55°C, Tolerance=0.05, Voltage Rating="50 V", Automotive=Yes, Automotive Grade="Grade 1", Category=Cap, ComponentLink2Description=Datasheet, ComponentLink2URL=https://api.kemet.com/component-edge/download/datasheet/C0603C100J5GACAUTO.pdf, Device Class L1="Passive Components", Device Class L2=Capacitors, Device Class L3="Ceramic Capacitors", Digikey Description="Capacitor; Ceramic; Cap; 33.0pF; Tol 5%; SMT; Vol-Rtg 50V; C0G; Tape and Reel", Height=0.87mm, Lead Free=Yes, Material=Ceramic, Mouser Description="Capacitor; Ceramic; Cap; 33.0pF; Tol 5%; SMT; Vol-Rtg 50V; C0G; Tape and Reel", Octopart=https://octopart.com/c0603c330j5gactu-kemet-87666, RoHS=TRUE
C28: library part CMP-13271-002648-1, "CL21 Series 0805 150nF 16V ±10% Tolerance X7R Multilayer Ceramic Chip Capacitor", Case Code (Metric)=2012, Case Code (Imperial)=0805, Dielectric=X7R, Max Operating Temperature=125°C, Min Operating Temperature=-55°C, Package Quantity=1, Tolerance=10%, Voltage Rating=16V, Capacitance=150nF, Case/Package=0805, Depth=1.25mm, Height=0.65mm, Length=2mm, Mount="Surface Mount", Packaging="Tape and Reel", Radiation Hardening=No, Thickness=0.03inch, Voltage Rating (DC)=16V, Width=0.049inch
C29 C30 C32 C33: library part CMP-04427-014896-1, "General Purpose Ceramic Capacitor, 0603, 33pF, 5%, NP0, 30ppm/°C, 50V", Case Code (Metric)=1608, Case Code (Imperial)=0603, Dielectric=C0G, Dielectric Material=Ceramic, Max Operating Temperature=125°C, Min Operating Temperature=-55°C, Package Quantity=4000, Temperature Coefficient=30ppm/°C, Tolerance=5%, Voltage=50V, Insulation Resistance=100GR, Capacitance=33pF, Case/Package=0603, Contact Plating=Tin, Depth=0.81mm, Height=0.63mm, Lead Free="Lead Free", Length=1.6mm, Mount="Surface Mount", Number of Pins=2, Packaging="Tape and Reel", Radiation Hardening=No, REACH SVHC="No SVHC", RoHS Compliant=Yes, Termination=SMD/SMT, Thickness=0.034inch, Voltage Rating=50V, Voltage Rating (DC)=50V, Width=0.81mm
C31: library part CMP-05428-000959-1, "Conductive Polymer Aluminum Solid Capacitors (OS-CON) 47uF ±20% 10V", Case/Package=Radial, ESR (Equivalent Series Resistance)=50mR, Leakage Current=94uA, Max Operating Temperature=105°C, Min Operating Temperature=-55°C, Package Quantity=1000, Ripple Current=1.62A, Tolerance=20%, Voltage=10V, Capacitance=47uF, Construction=Cylindrical, Diameter=6.3mm, Dissipation Factor=12%, Height=5.9mm, Height - Seated (Max)=0.236inch, Lead Free="Lead Free", Length=5.9mm, Life (Hours)=2000Hour, Material=Polymer, Mount="Surface Mount", Number of Pins=6, Packaging="Tape and Reel", Polarity=Polar, REACH SVHC="No SVHC", Ripple Current (AC)=1.62A, RoHS Compliant=Yes, Series="OS-CON™, SVP", Termination=SMD/SMT, Voltage Rating=10V, Voltage Rating (DC)=10V
C34: library part CMP-03020-034671-1, "CAP CER 10UF 16V X5R 0805", Capacitance=10uF, Case Code (Metric)=2012, Case Code (Imperial)=0805, Dielectric=X5R, Dielectric Material=Ceramic, Max Operating Temperature=85°C, Min Operating Temperature=-55°C, Package Quantity=1, Tolerance=10%, Voltage=16V, Case/Package=0805, Construction=Flat, Contact Plating=Tin, Depth=1.25mm, Dissipation Factor=5%, Height=1.25mm, Lead Free="Lead Free", Length=2mm, Mount="Surface Mount", Number of Pins=2, Packaging="Tape and Reel", Radiation Hardening=No, REACH SVHC="No SVHC", Series=C, Termination=SMD/SMT, Thickness=0.055inch, Voltage Rating=16V, Voltage Rating (DC)=16V, Width=0.049inch
D1: library part CMP-44529-000017-1, "LED GREEN CLEAR CHIP SMD", Case Code (Metric)=2012, Case Code (Imperial)=0805, Color=Green, Forward Current=20mA, Forward Voltage=2.1V, Lens Color=Colorless, Max Operating Temperature=85°C, Min Operating Temperature=-40°C, Package Quantity=2000, Power Rating=75mW, Case/Package=0805, Dominant Wavelength=570nm, Height=0.75mm, Lead Free="Lead Free", Length=2mm, Lens Style=Clear, Lens Transparency=Clear, Luminous Intensity=70mcd, Mount="Surface Mount", Packaging="Tape and Reel", Test Current=20mA, Viewing Angle=120°, Width=1.25mm, Illumination Color=Green
D2: library part CMP-44529-000070-1, "LED RED CLEAR SMD", Case Code (Metric)=2012, Case Code (Imperial)=0805, Color=Red, Forward Current=20mA, Forward Voltage=2V, Max Operating Temperature=85°C, Min Operating Temperature=-40°C, Package Quantity=2000, Case/Package=0805, Dominant Wavelength=625nm, Height=1.1mm, Lead Free="Lead Free", Length=2mm, Lens Style=Clear, Luminous Intensity=15mcd, Mount="Surface Mount", Packaging="Tape and Reel", RoHS Compliant=Yes, Test Current=20mA, Viewing Angle=120°, Wavelength=627nm, Width=1.25mm, Illumination Color=Red
D3: library part CMP-02539-000012-1, "DIODE SCHOTTKY 40V 3A DO214AB", Forward Current=3A, Manufacturer=Vishay, Max Junction Temp=+150°C, Max Repetitive Reverse Voltage=40V, Max Surge Forward Current=100A, Package=95402, Peak Reverse Current=0.5mA, Temperature="-55°C to +150°C", Temperature Range Low=-55°C, Automotive=No, Category=Diode, ComponentLink2Description=Datasheet, ComponentLink2URL=http://www.vishay.com/docs/88751/ss32.pdf, Device Class L1="Discrete Semiconductors", Device Class L2=Diodes, Device Class L3="Schottky Diodes", Digikey Description="DIODE SCHOTTKY 40V 3A DO214AB", Footprint Url=http://www.vishay.com/docs/95402/smc.pdf, Height=2.62mm, Lead Free=Yes, Manufacturer Part Number=SS34-E3/57T, Mouser Description="Schottky Diodes & Rectifiers 3.0 Amp 40 Volt", Octopart=https://octopart.com/ss34-e3%2F57t-vishay-39552907, RoHS=TRUE, Standoff Height=0mm, Temperature Range High=+150°C
D4 D5: library part CMP-02129-71131536-1, "HSMR-C191 High-Performance Chip LED Single Color LED, Blue, Untinted Diffused, 1mm", Case Code (Metric)=1608, Case Code (Imperial)=0603, Color=Blue, Forward Current=20mA, Forward Voltage=3.4V, Lens Color="Clear, White", Max Junction Temperature (Tj)=95°C, Max Operating Temperature=85°C, Max Power Dissipation=78mW, Min Operating Temperature=-40°C, Reverse Voltage=5V, Case/Package=0603, Contact Plating=Gold, Depth=800µm, Dominant Wavelength=473nm, Height=600µm, Lead Free="Lead Free", Length=1.6mm, Lens Style=Diffused, Lens Transparency=Diffused, Luminous Flux=88lm, Luminous Intensity=55mcd, Mount="Surface Mount", NexarPartId=71131536, Number of Elements=1, Number of LEDs=1, Number of Pins=2, Packaging="Tape and Reel", Peak Wavelength=469nm, Power Dissipation=78mW, Power Rating=78mW, Radiation Hardening=No, REACH SVHC="No SVHC", RoHS=Compliant, Schedule B=8541402000, Test Current=20mA, Viewing Angle=140°, Wavelength=473nm, Width=800µm, Illumination Color=Blue
D6: library part CMP-0303-00003-3, "DIODE SCHOTTKY 40V 1A SOD123", Average Rectified Current=1A, Capacitance=110pF, Case/Package=SOD-123-2, Forward Voltage=450mV, Max Forward Surge Current (Ifsm)=25A, Max Operating Temperature=125°C, Max Power Dissipation=450mW, Max Repetitive Reverse Voltage (Vrrm)=40V, Min Operating Temperature=-65°C, Package Quantity=3000, Peak Reverse Current=50uA, Contact Plating=Tin, Current Rating=1A, Element Configuration=Single, Forward Current=1A, Height=1.25mm, Lead Free="Lead Free", Length=2.85mm, Max Reverse Voltage (DC)=40V, Number of Pins=2, Output Current=1A, Packaging="Tape and Reel", Peak Non-Repetitive Surge Current=25A, Polarity=Standard, Radiation Hardening=No, REACH SVHC="No SVHC", Termination=SMD/SMT, Voltage Rating (DC)=40V, Weight=0.000353oz, Width=1.7mm
D7: library part CMP-32890-000004-1, "DIODE SCHOTTKY 10V 3A SOD323-2", Average Rectified Current=3A, Case/Package=SOD-323-2, Forward Voltage=370mV, Max Operating Temperature=85°C, Max Repetitive Reverse Voltage (Vrrm)=10V, Min Operating Temperature=-55°C, Peak Non-Repetitive Surge Current=5A, Contact Plating=Tin, Current Rating=3A, Element Configuration=Single, Forward Current=3A, Halogen Free="Not Halogen Free", Lead Free="Lead Free", Max Reverse Voltage (DC)=10V, Mount="Surface Mount", Number of Pins=2, Output Current=3A, Packaging="Tape and Reel", Polarity=Standard, Radiation Hardening=No, REACH SVHC="No SVHC", Voltage Rating (DC)=10V
E1: Package=None, Availability=Unavailable, MP=YFGC025WWB, Price=None
E2: library part NN02-224, "Ultra-compact form antenna booster for GSM, UMTS, 4G, GNSS, Bluetooth, Wi-Fi Dual Band (824 - 960MHz, 1710 - 2690MHz, 1561 - 1606MHz, 2400 - 2500MHz and 4900 - 5875MHz), signal booster", Package="SMD Ignion", Check_prices=https://www.snapeda.com/parts/NN02-224/Ignion/view-part/?ref=eda, MF=Ignion, MP=NN02-224, SnapEDA_Link=https://www.snapeda.com/parts/NN02-224/Ignion/view-part/?ref=snap
J1: library part CMP-2000-05797-1, "PC Terminal Block, Pitch 6.35 mm, 1 x 2 Position, Height 21.5 mm, Tail Lenght 5.1 mm, RoHS, Bulk", Manufacturer="Phoenix Contact", Package Description="PC Terminal Block, Pitch 6.35 mm, 1 x 2 Position, Height 21.5 mm, Tail Lenght 5.1 mm", Datasheet URL=http://media.digikey.com/pdf/Data%20Sheets/Phoenix%20Contact%20PDFs/1714955.pdf, Datasheet Version=02/2010, Manufacturer URL=http://www.phoenixcontact.com/, Mounting Technology=ThroughHole, Package Reference=1714955
J2: library part CMP-00257-00278173-1, "22-28-4050 KK® 254 Breakaway Header, Vertical, 5 Circuits, Tin (Sn) Plating, Mating Pin Length 6.09mm", Color=Black, Contact Resistance=20mΩ, Current Rating=4A, Flammability Rating="UL94 V-0", Max Operating Temperature=75°C, Max Voltage Rating (DC)=250.25kV, Min Operating Temperature=0°C, Voltage Rating=250V, Connector Type="Male Pin", Contact Material=Brass, Contact Mating Length=6.096mm, Contact Plating=Tin, Gender=Male, Glow Wire Compliant=Non-compliant, Height=2.29mm, Housing Color=Black, Housing Material=Thermoplastic, Lead Free="Lead Free", Lead Pitch=2.54mm, Length=12.7mm, Mount="Through Hole", NexarPartId=278173, Number of Circuits=5, Number Of Contacts=5, Number of Positions=5, Number of Rows=1, Orientation=Vertical, Packaging=Bulk, Pitch=2.54mm, Radiation Hardening=No, REACH SVHC=Unknown, RoHS=Compliant, Schedule B=8536694040, Termination=Solder, Voltage Rating (DC)=250V, Width=2.49mm
J3: "7 (6 + 1) Position Card Connector Micro SIM Surface Mount, Right Angle Gold", Package=None, Check_prices=https://www.snapeda.com/parts/SIM7100-6-1-15-00-A/Global+Connector+Technology/view-part/?ref=eda, MF="Global Connector Technology", MP=SIM7100-6-1-15-00-A, SnapEDA_Link=https://www.snapeda.com/parts/SIM7100-6-1-15-00-A/Global+Connector+Technology/view-part/?ref=snap
J4 J5: library part CMP-15831-000005-1, "CONN HEADER VERT 2POS 2MM", Current Rating=2A, Manufacturer=Harwin, Package=0, Temperature="-40°C to +105°C", Temperature Range High=+105°C, Temperature Range Low=-40°C, Automotive=No, Category=Conn, ComponentLink2Description=Datasheet, ComponentLink2URL=https://cdn.harwin.com/pdfs/C018XX_M22_Series_Connectors.pdf, Conn Gender=Male, Conn Orientation=Vertical, Contact Material=Gold,Nickel, Device Class L1=Connectors, Device Class L2="Headers and Wire Housings", Device Class L3=unset, Digikey Description="CONN HEADER VERT 2POS 2MM", Footprint Url=https://cdn.harwin.com/pdfs/M22-251.pdf, Height=5.45mm, Lead Free=Yes, Manufacturer Part Number=M22-2510205, Mouser Description="Headers & Wire Housings 2 PIN SIL VERTICAL GOLD PIN HEADER", Number Of Contacts=2, Number of Rows=1, Octopart=https://octopart.com/m22-2510205-harwin-2538221, Pitch=2mm, RoHS=TRUE
L1: library part CMP-14484-000123-1, "SMD Inductors 10uH ±20% 0.9A 0.1729Ω 1210", Case Code (Metric)=3225, Case Code (Imperial)=1210, Current Rating=900mA, DC Resistance (DCR)=172.9mR, Max Operating Temperature=105°C, Min Operating Temperature=-40°C, Package Quantity=1000, Resistor Type=Wirewound, Self Resonant Frequency=23MHz, Test Frequency=100kHz, Tolerance=20%, Case/Package=1210, Core Material=Ferrite, DC Current=900mA, Depth=2.7mm, Halogen Free="Halogen Free", Height=2.5mm, Height - Seated (Max)=0.106inch, Lead Free="Lead Free", Length=3.4mm, Max DC Current=900mA, Military Standard=Not, Mount="Surface Mount", Number of Pins=2, Packaging="Tape and Reel", Radiation Hardening=No, Saturation Current=900mA, Series=CB, Shielding=Unshielded, Termination=SMD/SMT, Width=0.098inch, Inductance=10uH, Inductance Tolerance=20%
P1: library part CMP-2000-05465-1, "Male Header, Pitch 1.25 mm, 1 x 3 Position, Height 4.2 mm, Tail Length 2.3 mm, -40 to 85 degC, RoHS, Tray", Manufacturer=Molex, Package Description="Male Header, Pitch 1.25 mm, 1 x 3 Position, Height 4.2 mm, Tail Length 2.3 mm", Datasheet URL=http://www.molex.com/pdm_docs/sd/530470310_sd.pdf, Datasheet Version="Rev. E, 11/1994", Manufacturer URL=http://www.molex.com/, Mounting Technology=ThroughHole, Package Reference=530470310
P3 UART: library part CMP-1024-00358-1, "0.025\" SQ Post Header, Through-hole, Vertical, -55 to 125 degC, 2.54 mm Pitch, 4-Pin, Male, RoHS", Manufacturer=Samtec, Temperature Range="-55 to 125 degC", ComponentLink1Description="Manufacturer URL", ComponentLink1URL=http://www.samtec.com, ComponentLink2Description=Datasheet, ComponentLink2URL=http://www.samtec.com/documents/webfiles/pdf/TSW_TH.PDF, ComponentLink3Description="Package Specification", ComponentLink3URL=http://www.samtec.com/documents/webfiles/cpdf/TSW-XXX-XX-XXX-X-XX-XXX-MKT.pdf, DatasheetVersion=F-214, Mounting Technology=Through-hole, Orientation=Vertical, PackageDescription=".025[0.64] SQ. Post Terminal Strip Assembly", PackageReference=TSW-104-08-X-S, PackageVersion="DM, 8/1988", PartNumber=TSW-104-08-L-S, Pitch="2.54 mm", RoHS=True
Q1 Q2 Q3: library part CMP-1048-00558-1, "Low Noise Transistor, NPN Silicon, 3-Pin SOT-23, Pb-Free, Tape and Reel", Manufacturer="On Semiconductor", ComponentLink1Description="Manufacturer URL", ComponentLink1URL=http://www.onsemi.com/, ComponentLink2Description=Datasheet, ComponentLink2URL=http://www.onsemi.cn/pub_link/Collateral/MMBT5088LT1-D.PDF, ComponentLink3Description="Package Specification", ComponentLink3URL=http://www.onsemi.cn/pub_link/Collateral/318-08.PDF, DatasheetVersion="Rev. 4", fT Min (MHz)=50, Mounting Technology="Surface Mount", PackageDescription="3-Pin Small Outline Transistor, Body 2.92 x 1.3 mm, Pitch 0.95 mm", PackageReference=SOT-23-3-318-08, PackageVersion="Rev. AP, 11/2009", Packing="Tape and Reel", PartNumber=MMBT5088LT1G, Polarity=NPN, RoHS=TRUE, IC Continuous (A)=0.05
Q4: library part CMP-32901-000130-1, "MOSFET P-CH 20V 3.7A SOT-23", Continuous Drain Current=-3.7A, Drain To Source Breakdown Voltage=-20V, Drain To Source Resistance=0.05Ω, Gate To Source Voltage=12V, Manufacturer=Infineon, Max Forward Diode Voltage=-1.2V, Max Junction Temp=+150°C, Package=Micro3, Power Dissipation=1.3W, Pulse Drain Current=-22A, Temperature="-55°C to +150°C", Temperature Range Low=-55°C, Input Capacitace At Vds="633pF @ -10V", Automotive=No, Category=Trans, ComponentLink2Description=Datasheet, ComponentLink2URL=https://www.infineon.com/dgdl/irlml6402pbf.pdf?fileId=5546d462533600a401535668d5c2263c, Depletion Mode=False, Device Class L1="Discrete Semiconductors", Device Class L2=Transistors, Device Class L3=MOSFETs, Digikey Description="MOSFET P-CH 20V 3.7A SOT-23", Drain To Source Voltage=-20V, Footprint Url=http://irf.com/package/outline/po_micro3.pdf, Gate Charge At Vgs="8nC @ -5V", Height=1.12mm, Lead Free=Yes, Manufacturer Part Number=IRLML6402TRPBF, Number Of Channels=1, Number Of P Channels=1, Octopart=https://octopart.com/irlml6402trpbf-infineon-65874989, Reverse Recovery Charge=11nC, Reverse Recovery Time=29ns, RoHS=TRUE, Rthja Max=75°C/W, Standoff Height=0.01mm, Technology=MOSFET, Temperature Range High=+150°C, Threshold Vgs=-0.55V, Threshold Vgs Max=-1.2V, Threshold Vgs Min=-0.4V, Turn Off Delay Time=588ns, Turn On Delay Time=350ns, Ipc Land Pattern Name=SOT95P237X100-3
R1: library part CMP-26527-004884-1, "General Purpose Thick Film Chip Resistor, 1206, 0.4Ω, 5%, 100ppm/°C, 0.5W", Max Operating Temperature=155°C, Min Operating Temperature=-55°C, Tolerance=5%, Mount="Surface Mount", Packaging="Tape and Reel", RoHS Compliant=Yes
R2 R19: library part CMP-03412-005349-1, "RES SMD 10K OHM 1% 1/10W 0603", Manufacturer=Yageo, Manufacturer Part Number=RT0603FRE0710KL, Package=RT0603, Power Rating=0.1W, Resistance=10KΩ, Temperature="-55°C to +155°C", Temperature Coefficient="50 ppm/°C", Temperature Range High=+155°C, Temperature Range Low=-55°C, Tolerance=0.01, Voltage Rating=75V, Automotive=No, Category=Res, ComponentLink2Description=Datasheet, ComponentLink2URL=http://www.yageo.com/documents/recent/PYu-RT_1-to-0.01_RoHS_L_9.pdf, Composition="Thin Film", Device Class L1="Passive Components", Device Class L2=Resistors, Device Class L3="Chip SMD Resistors", Digikey Description="RES SMD 10K OHM 1% 1/10W 0603", Footprint Url=http://www.yageo.com/exep/pages/download/literatures/PYu-R_Mount_10.pdf, Height=0.55mm, Lead Free=Yes, Mouser Description="Thin Film Resistors - SMD 10K ohm 1% 1/10W", Octopart=https://octopart.com/rt0603fre0710kl-yageo-40009243, RoHS=TRUE, Series=RT, Ipc Land Pattern Name=RESC16080X45
R3: library part CMP-1013-00697-2, Manufacturer=Yageo, Part Number=RC0805FR-0745K3L
R4 R5: library part CMP-03412-013082-1, "RES SMD 1K OHM 0.1% 1/10W 0603", Manufacturer=Yageo, Manufacturer Part Number=RT0603BRD071KL, Package=RT0603, Power Rating=0.1W, Resistance=1kΩ, Temperature="-55°C to +155°C", Temperature Coefficient=25ppm/°C, Temperature Range High=+155°C, Temperature Range Low=-55°C, Tolerance=0.1%, Voltage Rating=75V, Automotive=No, Category=Res, ComponentLink2Description=Datasheet, ComponentLink2URL=https://www.yageo.com/upload/media/product/productsearch/datasheet/rchip/PYu-RT_1-to-0.01_RoHS_L_11.pdf, Composition="Thin Film", Device Class L1="Passive Components", Device Class L2=Resistors, Device Class L3="Chip SMD Resistors", Digikey Description="RES SMD 1K OHM 0.1% 1/10W 0603", Footprint Url=https://www.yageo.com/upload/website/yageo_PYu-R_Mount_10_19050818_343.pdf, Height=0.55mm, Lead Free=Yes, Octopart=https://octopart.com/rt0603brd071kl-yageo-1433776, RoHS=TRUE, Series=RT